# Altium PCB PCB1.PcbDoc
Units mil, origin at the board's own origin, x right, y up, seen from the top; angles counter-clockwise.
Board outline 1910 x 835 mil, 2 copper layers (Top Layer, Bottom Layer); 8 components, 6 nets, 21 pads, 0 vias.
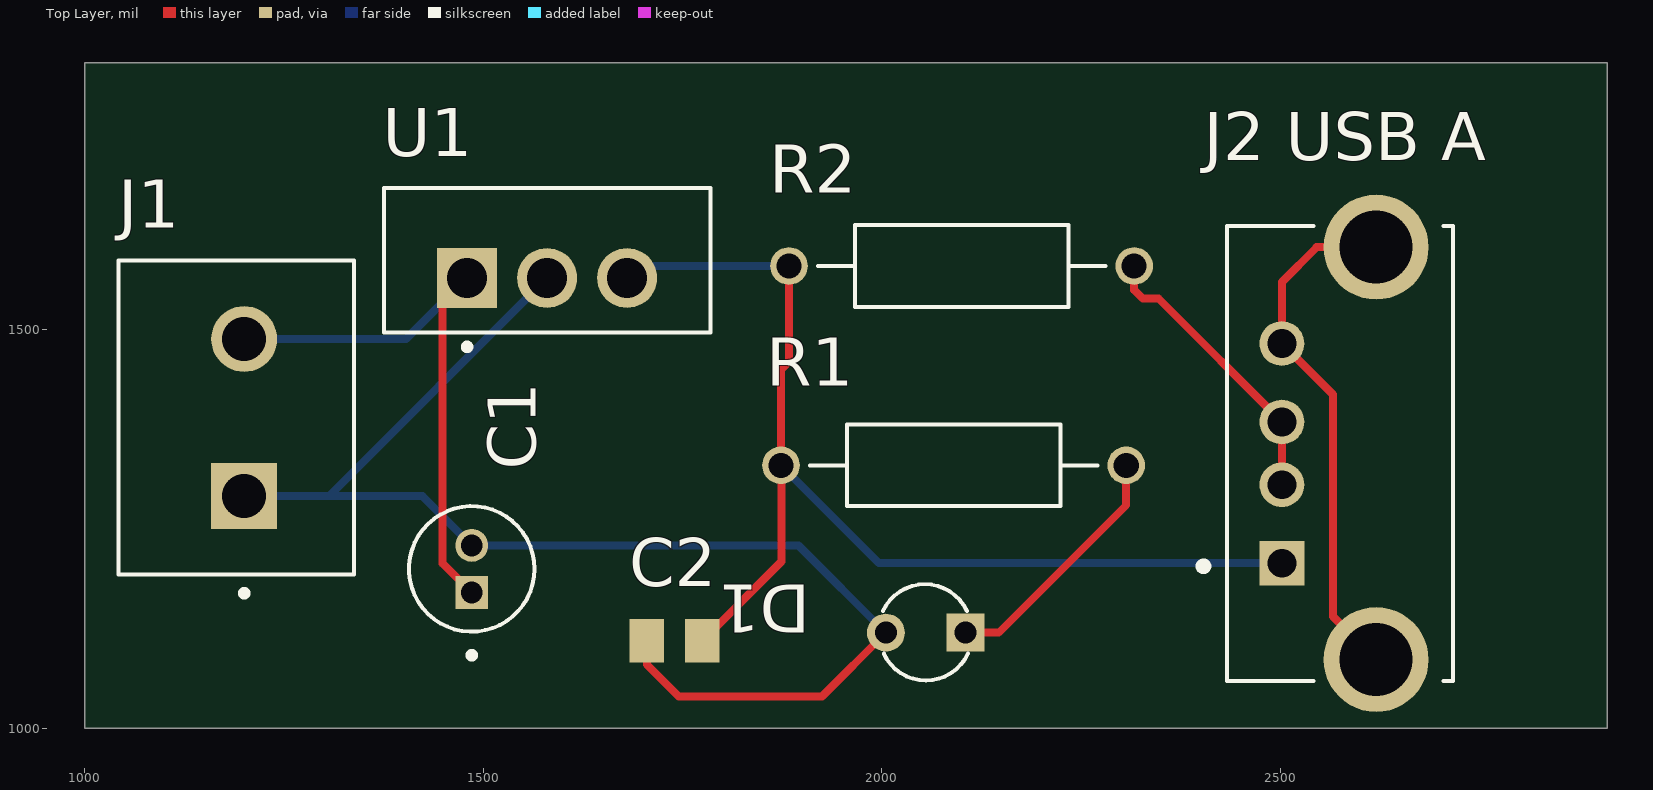
[diagram p0: Top Layer view]
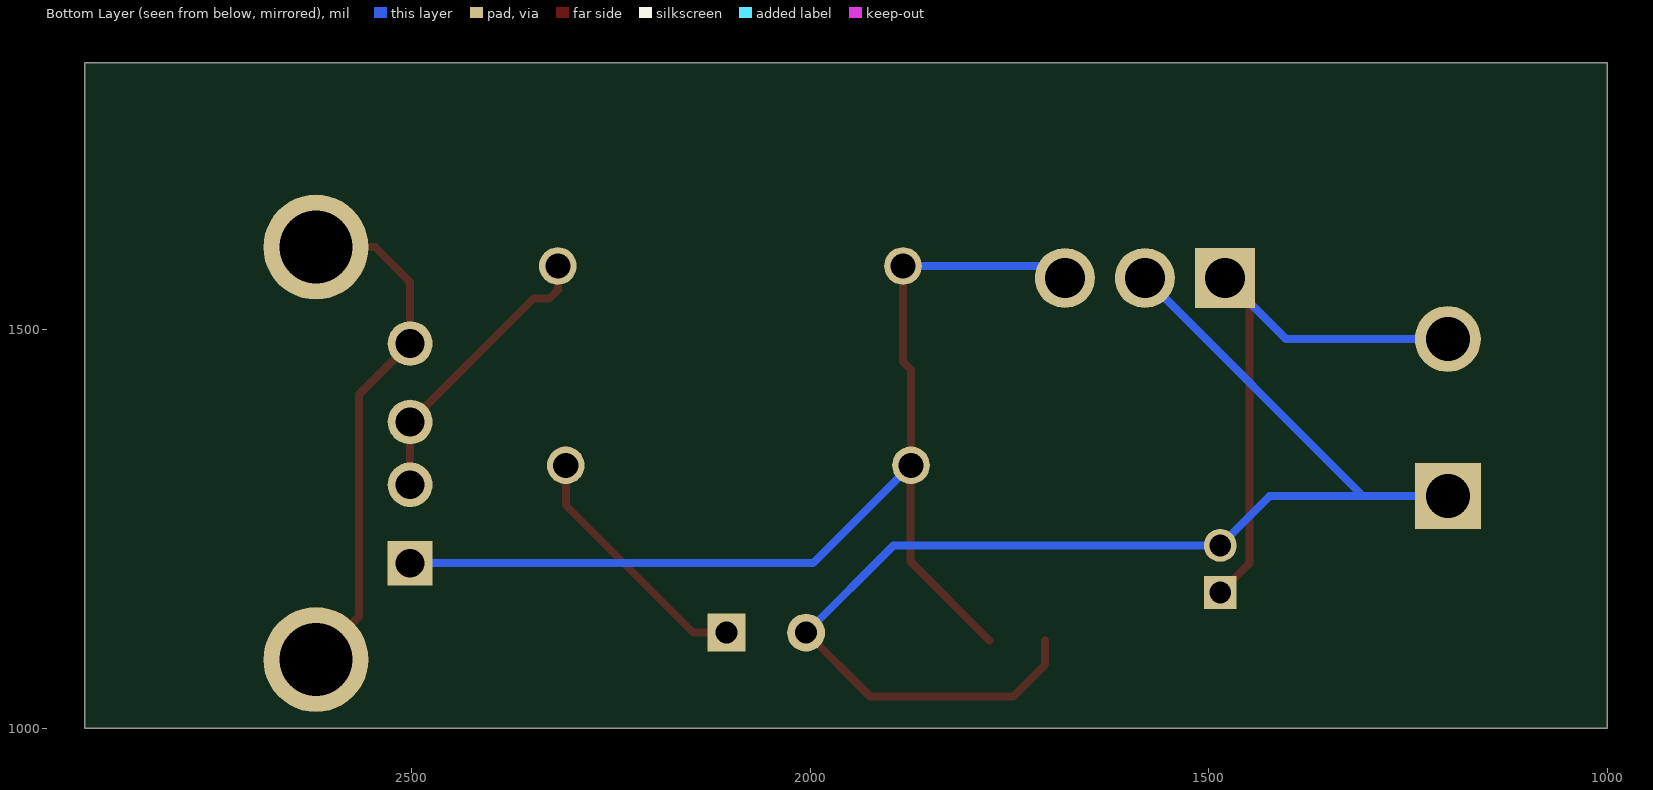
[diagram p1: Bottom Layer view, seen from below]
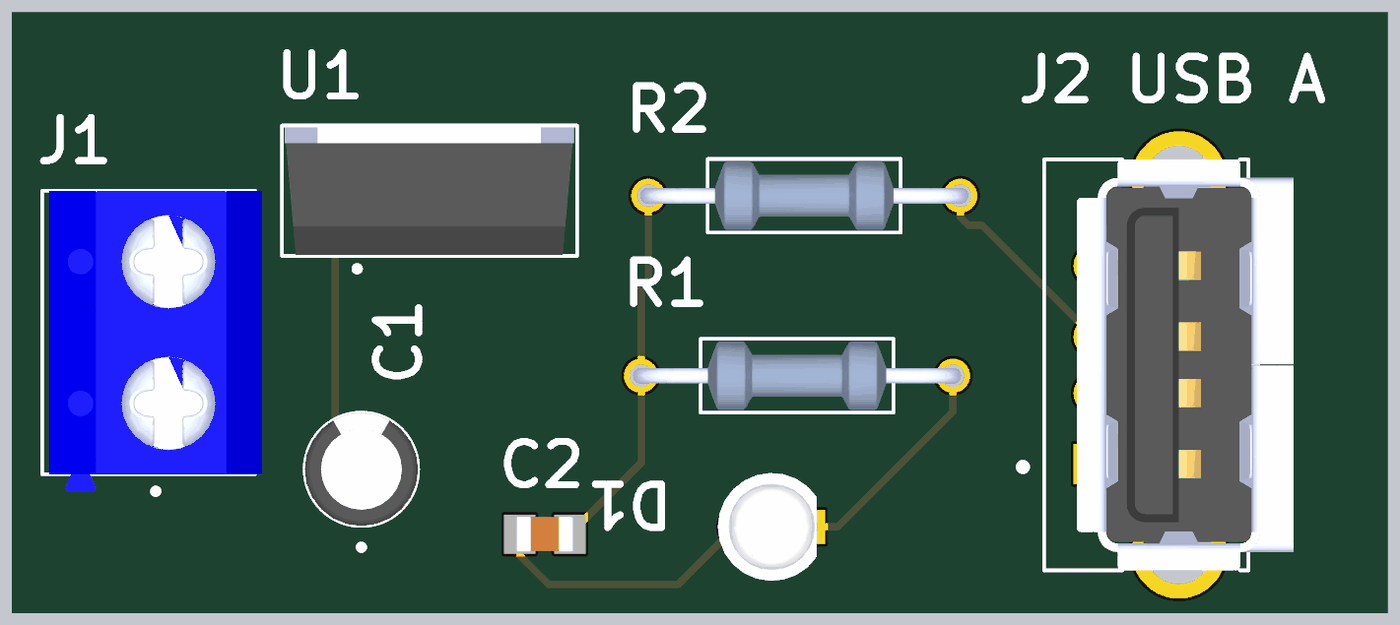
[diagram p2: 3D render of the assembled board from above, using the file's embedded part models]

## Layer stack, top to bottom
Top Solder: solder mask 0.4, Solder Resist, Dk 3.5
Top Layer: signal copper 1.4
Dielectric 1: dielectric 12.6, FR-4, Dk 4.8
Bottom Layer: signal copper 1.4
Bottom Solder: solder mask 0.4, Solder Resist, Dk 3.5

## Board outline
1000,1000 2910,1000 2910,1835 1000,1835

## Design rules (kind name [scope] priority, off if disabled: settings)
Clearance [All] p1: gap=10 ignorepadtopadclearanceinfootprint=FALSE
PolygonConnect [All] p1: connectstyle=Relief reliefconductorwidth=10 reliefentries=4 polygonreliefangle="90 Angle" airgapwidth=10
RoutingVias [All] p1: holewidth=28 width=50 viastyle="Through Hole" minholewidth=28 minwidth=50 maxholewidth=28 maxwidth=50
SolderMaskExpansion [All] p1: expansion=4 istentingtop=FALSE
SupplyNets "Schematic Supply Nets" [InNet('GND')] p1: voltage=0.000
Width [All] p1: maxlimit=10 minlimit=10 preferedwidth=10
30 further rules are at their usual default settings.

## Components (designator, comment, footprint, x,y, rotation, side; value= is the part's Value field where it differs from the comment)
C1 "EEAGA1E100" CAPPRD150W45D400H700 1485.47,1200 r90 top
C2 "VJ0805Y104KXXCW1BC" CAPC2012X90N 1740,1110 r0 top
D1 "OVLAW4CB7" LEDRD254W50D305H520P 2055,1120 r180 top
J1 "KF301-2P [7.5V to 35V]" HANDSON_KF301-2P 1200,1390 r90 top
"J2 USB A" "USB-A1VSB6" ONSHORE_USB-A1VSB6 2620,1345 r90 top
R1 "MFR-25FBF52-1K" RESAD1100W55L680D260 2090,1330 r180 top (schematic designator "R1 270OHM")
R2 "MFR-25FBF52-1K" RESAD1100W55L680D260 2100,1580 r180 top (schematic designator "R2 10K OHM")
U1 "L7805CV" TO255P1040X460X1968-3 1479.61,1565 r0 top

## Footprints (in the part's own frame and the unit in brackets; to place one, negate y for a bottom-side part, rotate by r counter-clockwise, add the part's x,y. Pads: shape width x height; smd on the part's side, far side on the other; paste and mask are expansions set on the pad)
CAPC2012X90N [mm]
  rect 1.1x1.38 smd: 1(-0.885,0) 2(0.885,0)
  body extent -1,-0.63 1,0.63, height 0.9
CAPPRD150W45D400H700 [mm]
  round 1.05 hole 0.7: N(0.75,0)
  rect 1.05x1.05 hole 0.7: P(-0.75,0)
  silkscreen extent -2.85,-2 2,2, body extent -2,-2 2,2, height 7
HANDSON_KF301-2P [mm]
  rect 2.1x2.1 / inner round 2.1 / far side rect 2.1x2.1 hole 1.4: 1(-2.5,0)
  round 2.1 hole 1.4: 2(2.5,0)
  silkscreen extent -5.7,-3.5 5,4, body extent -5.6,-3.75 5,3.75, height 10
LEDRD254W50D305H520P [mm]
  rect 1.208x1.208 / inner round 1.208 / far side rect 1.208x1.208 hole 0.7: A(-1.27,0)
  round 1.208 hole 0.7: C(1.27,0)
  silkscreen extent -1.34,-1.54 1.36,1.52, body extent -1.59,-1.9 1.91,1.9, height 6.71
ONSHORE_USB-A1VSB6 [mm]
  rect 1.428x1.428 / inner round 1.428 / far side rect 1.428x1.428 hole 0.92: 1(-3.5,3)
  round 1.428 hole 0.92: 2(-1,3) 3(1,3) 4(3.5,3)
  round 3.346 hole 2.33: S1(-6.57,0) S2(6.57,0)
  silkscreen extent -7.25,-2.45 7.25,5.6, body extent -7.84,-4.04 7.84,3.6, height 13.7
RESAD1100W55L680D260 [mm]
  round 1.2 hole 0.8: 1(-5.5,0) 2(5.5,0)
  silkscreen extent -4.58,-1.3 4.58,1.3, body extent -5.77,-1.2 5.77,1.2, height 2.4
TO255P1040X460X1968-3 [mm]
  rect 1.91x1.91 / inner round 1.91 / far side rect 1.91x1.91 hole 1.27: 1(0,0)
  round 1.91 hole 1.27: 2(2.55,0) 3(5.1,0)
  silkscreen extent -2.65,-2.29 7.75,2.86, body extent -2.56,-1.71 7.64,2.79, height 19.68

## Part data
C1: "CAP ALUM 10UF 20% 25V RADIAL", Package="RADIAL-2 Panasonic", Availability="In Stock", Check_prices=https://www.snapeda.com/parts/EEA-GA1E100/Panasonic/view-part/2301584/?ref=eda, MF=Panasonic, MP=EEA-GA1E100, Price=None, SnapEDA_Link=https://www.snapeda.com/parts/EEA-GA1E100/Panasonic/view-part/2301584/?ref=snap
C2: "Capacitor: ceramic; MLCC; 100nF; 25V; X7R; Â±10%; SMD; 0805", Package="0805-2 VISHAY", Check_prices=https://www.snapeda.com/parts/VJ0805Y104KXXCW1BC/Vishay/view-part/?ref=eda, MF="Vishay Vitramon", MP=VJ0805Y104KXXCW1BC, SnapEDA_Link=https://www.snapeda.com/parts/VJ0805Y104KXXCW1BC/Vishay/view-part/?ref=snap
D1: "Ovlaw4Cb7 White LED 3mm (T-1) Round Lens Through Hole Package", Package=Package, Check_prices=https://www.snapeda.com/parts/OVLAW4CB7/TT+Electronics%252FOptek/view-part/?ref=eda, MF="TT Electronics/Optek", MP=OVLAW4CB7, SnapEDA_Link=https://www.snapeda.com/parts/OVLAW4CB7/TT+Electronics%252FOptek/view-part/?ref=snap
J1: library part KF301-2P, "2 Pin Terminal Block 5mm Pitch", Package=None, Check_prices=https://www.snapeda.com/parts/KF301-2P/Handson+Technology/view-part/?ref=eda, MF="Handson Technology", MP=KF301-2P, SnapEDA_Link=https://www.snapeda.com/parts/KF301-2P/Handson+Technology/view-part/?ref=snap
"J2 USB A": "USB-A (USB TYPE-A) - Receptacle Connector 4 Position Through Hole", Package=None, Availability="In Stock", Check_prices=https://www.snapeda.com/parts/USB-A1VSB6/On+Shore+Technology+Inc./view-part/?ref=eda, MF="On Shore", MP=USB-A1VSB6, Price=None, Purchase-URL=https://pricing.snapeda.com/search/part/USB-A1VSB6/?ref=eda, SnapEDA_Link=https://www.snapeda.com/parts/USB-A1VSB6/On+Shore+Technology+Inc./view-part/?ref=snap
R1 R2: "1.07 kOhms Â±1% 0.25W, 1/4W Through Hole Resistor Axial - Metal Film", Package="RADIAL-2 YAGEO", Check_prices=https://www.snapeda.com/parts/MFR-25FBF52-1K/Yageo/view-part/?ref=eda, MF=Yageo, MP=MFR-25FBF52-1K, SnapEDA_Link=https://www.snapeda.com/parts/MFR-25FBF52-1K/Yageo/view-part/?ref=snap
U1: "Linear Voltage Regulator IC Positive Fixed 1 Output 1.5A TO-220", Package="TO-220-3 STMicroelectronics", Check_prices=https://www.snapeda.com/parts/L7805CV/STMicroelectronics/view-part/?ref=eda, MF=STMicroelectronics, MP=L7805CV, SnapEDA_Link=https://www.snapeda.com/parts/L7805CV/STMicroelectronics/view-part/?ref=snap

## Nets (pads, with @x,y where several pads share a name; then routed paths per layer and width w, separated by ;. In a path a pad name is that pad's centre, name@x,y a point inside that pad or via, vN(x,y) a via of type N, cw(c..) or ccw(c..) an arc to the next point about the centre after c; other vN are vias at no path point)
GND: "J2 USB A.4" "J2 USB A.S1" "J2 USB A.S2" | length 658.8
  Top Layer w10: 2620,1086.34 2566,1140.34 2566,1418.69 2501.89,1482.8 2501.89,1560 2545.55,1603.66 2620,1603.66
NetC1_N: C1.N C2.1 D1.C J1.1 U1.2 | length 1642.3
  Top Layer w10: C2.1 1705.16,1080 1745.16,1040 1925,1040 D1.C
  Bottom Layer w10: J1.1 1306.57,1291.57 ; U1.2 1306.57,1291.57 ; D1.C 1895.47,1229.53 C1.N 1423.43,1291.57 1306.57,1291.57
NetC1_P: C1.P J1.2 U1.1 | length 733.6
  Top Layer w10: U1.1 1449,1534.39 1449,1206.94 C1.P
  Bottom Layer w10: J1.2 1403.03,1488.43 U1.1
NetC2_2: "J2 USB A.1" C2.2 R1.2 R2.2 U1.3 | length 1413.1
  Top Layer w10: C2.2 1874,1209.16 1874,1330 R1.2 1873.46,1450 1883.46,1460 R2.2
  Bottom Layer w10: U1.3 1680.39,1580 R2.2 ; R1.2 1996.26,1207.2 2501.89,1207.2
NetD1_A: D1.A R1.1 | length 317.8
  Top Layer w10: D1.A 2146.54,1120 2306.54,1280 R1.1
"NetJ2 USB A_2": "J2 USB A.2" "J2 USB A.3" R2.1 | length 362.7
  Top Layer w10: R2.1 2316.54,1550 2327.54,1539 2347.26,1539 2501.89,1384.37 2501.89,1305.63